# Altium PCB PCB1.PcbDoc
Units mm, origin at the board's own origin, x right, y up, seen from the top; angles counter-clockwise.
Board outline 74.6 x 22.6 mm, 2 copper layers (Top Layer, Bottom Layer); 21 components, 0 nets, 64 pads, 0 vias.
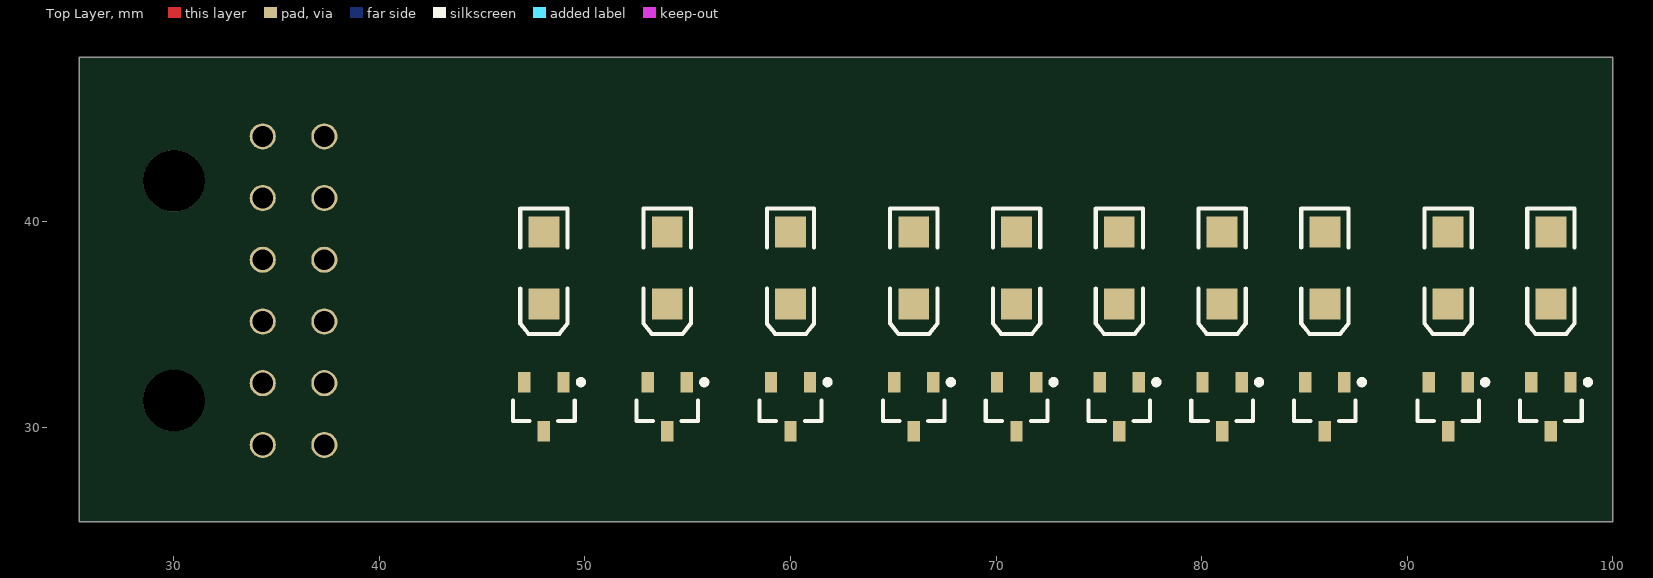
[diagram p0: Top Layer view]
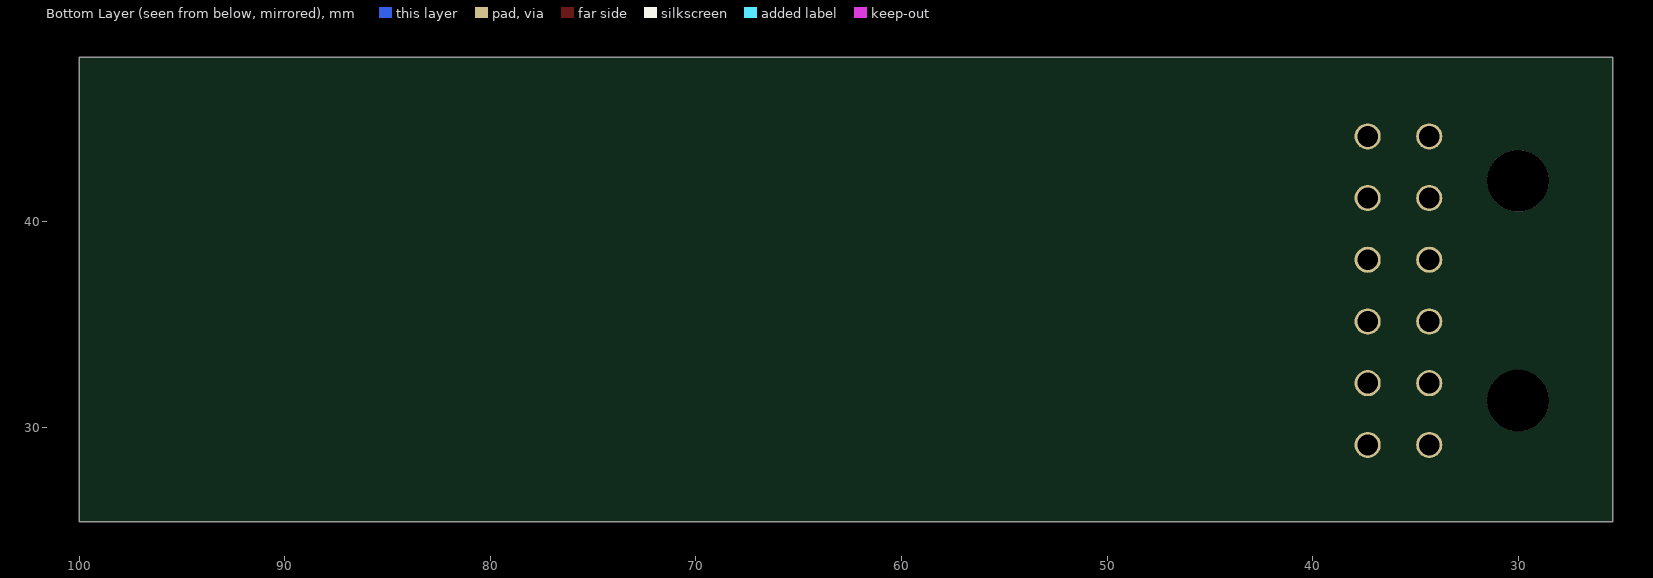
[diagram p1: Bottom Layer view, seen from below]

## Layer stack, top to bottom
Top Solder: solder mask 0.0102, Solder Resist, Dk 3.5
Top Layer: signal copper 0.0356
Dielectric 1: dielectric 0.32, FR-4, Dk 4.8
Bottom Layer: signal copper 0.0356
Bottom Solder: solder mask 0.0102, Solder Resist, Dk 3.5

## Board outline
25.4,25.4 100,25.4 100,48 25.4,48

## Design rules (kind name [scope] priority, off if disabled: settings)
Clearance [All] p1: gap=0.254 ignorepadtopadclearanceinfootprint=FALSE except(0: Arc-Hole Track-Hole SMDPad-Hole THPad-Hole Via-Hole Fill-Hole Poly-Hole Region-Hole Text-Hole)
PolygonConnect [All] p1: connectstyle=Relief reliefconductorwidth=0.254 reliefentries=4 polygonreliefangle="90 Angle" airgapwidth=0.254
RoutingVias [All] p1: holewidth=0.711 width=1.27 viastyle="Through Hole" minholewidth=0.711 minwidth=1.27 maxholewidth=0.711 maxwidth=1.27
SolderMaskExpansion [All] p1: expansion=0.102
Width [All] p1: maxlimit=0.254 minlimit=0.254 preferedwidth=0.254
30 further rules are at their usual default settings.

## Components (designator, comment, footprint, x,y, rotation, side; value= is the part's Value field where it differs from the comment)
? "Comment" SOT23-3 97,31 r270 top
? "Comment" SOT23-3 92,31 r270 top
? "Comment" SOT23-3 86,31 r270 top
? "Comment" SOT23-3 81,31 r270 top
? "Comment" SOT23-3 76,31 r270 top
? "Comment" SOT23-3 71,31 r270 top
? "Comment" SOT23-3 66,31 r270 top
? "Comment" SOT23-3 60,31 r270 top
? "Comment" SOT23-3 54,31 r270 top
? "Comment" SOT23-3 48,31 r270 top
? "Comment" 430451200 34.318,44.159 r270 top
? "Comment" 3.2X1.6X1.1 97,37.75 r270 top
? "Comment" 3.2X1.6X1.1 92,37.75 r270 top
? "Comment" 3.2X1.6X1.1 86,37.75 r270 top
? "Comment" 3.2X1.6X1.1 81,37.75 r270 top
? "Comment" 3.2X1.6X1.1 76,37.75 r270 top
? "Comment" 3.2X1.6X1.1 71,37.75 r270 top
? "Comment" 3.2X1.6X1.1 66,37.75 r270 top
? "Comment" 3.2X1.6X1.1 60,37.75 r270 top
? "Comment" 3.2X1.6X1.1 54,37.75 r270 top
? "Comment" 3.2X1.6X1.1 48,37.75 r270 top

## Footprints (in the part's own frame and the unit in brackets; to place one, negate y for a bottom-side part, rotate by r counter-clockwise, add the part's x,y. Pads: shape width x height; smd on the part's side, far side on the other; paste and mask are expansions set on the pad)
3.2X1.6X1.1 [mm] "SMT LED; 2 Flat Leads"
  rect 1.5x1.5 smd: 1(-1.75,0) 2(1.75,0)
  silkscreen extent -2.9,-1.15 3.2,1.15
430451200 [mil] "Molex Microfit 12 pos"
  round 50 hole 40: 1(591,0) 2(472.8,0) 3(354.6,0) 4(236.4,0) 5(118.2,0) 6(0,0) 7(591,118) 8(472.8,118) 9(354.6,118) 10(236.4,118) 11(118.2,118) 12(0,118)
  round 118 hole 118 mask+0: ""(85,-170) ""(506,-170)
  body extent -142,-350 730,132, height 390
SOT23-3 [mm] "SOT23, 3-Leads, Body 2.92x2.45mm, Pitch 0.95mm, IPC Medium Density"
  rect 1x0.6 smd: 1(-1.2,0.95) 2(-1.2,-0.95) 3(1.2,0)
  silkscreen extent -1.32,-1.5 0.7,1.93, body extent -0.7,-1.52 0.7,1.52, height 1.1

## Nets (pads, with @x,y where several pads share a name; then routed paths per layer and width w, separated by ;. In a path a pad name is that pad's centre, name@x,y a point inside that pad or via, vN(x,y) a via of type N, cw(c..) or ccw(c..) an arc to the next point about the centre after c; other vN are vias at no path point)
pads on no net: ?. ?.1 ?.2 ?.3 ?.4 ?.5 ?.6 ?.7 ?.8 ?.9 ?.10 ?.11 ?.12